# EAGLE board main (EAGLE 9.0.1)
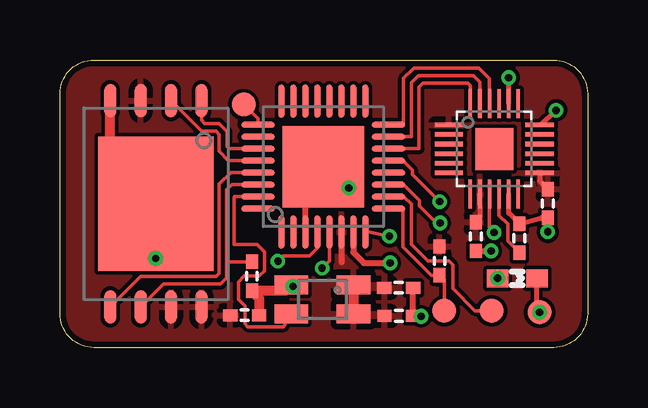
[diagram p0: board, top side]
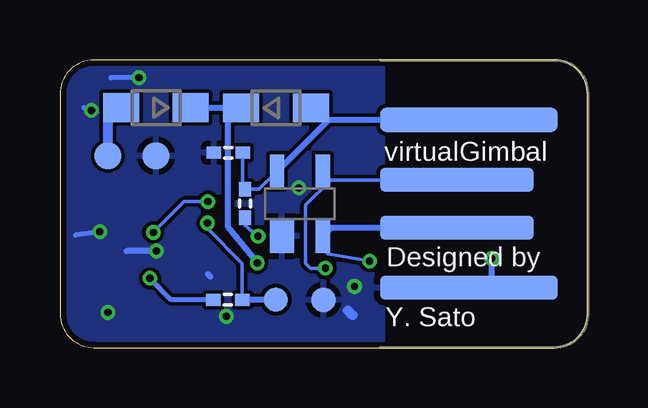
[diagram p1: board, bottom side, seen from below]

Size 22 x 12 mm. Coordinates in mm from the lower left corner, seen from the top.
Outline: 1.41,0 arc-90 0,1.41 0,10.59 arc-90 1.41,12 20.59,12 arc-90 22,10.59 22,1.41 arc-90 20.59,0 1.41,0
Copper layers (1*16): Top 0.035mm / dielectric 1.5mm / Bottom 0.035mm
Design rules "SeeedStudio_2layer_DRU_no_angle_20140221": minimum track width 6mil, minimum drill 12mil, track to track 6mil, track to pad 6mil, pad to pad 6mil, via to via 6mil, smd to smd 0mil, copper to edge 10mil, drill to drill 10mil, minimum pad ring 10mil, minimum via ring 6mil, stop-mask expansion 2mil, vias tented up to drill 100mil, thermal gap 10mil

## Footprints (pad centres in the part's own frame; a part is rotated, then mirrored left to right if it is on the bottom)
1005 = smd 0.6 x 0.5: P$1 -0.6,0; P$2 0.6,0
TP10R = smd 1 x 1: TP 0,0
USB_BARE = smd 1 x 7.41: 1 3.5,-3.705; 4 -3.5,-3.705 | smd 1 x 6.41: 2 1,-3.205; 3 -1,-3.205
SOD323-W = smd 1.5 x 1.2: A 1.45,0; C -1.45,0
SOT143 = smd 1 x 1.4: 1 -0.75,-1.35 | smd 0.6 x 1.4: 2 0.95,-1.35; 3 0.95,1.35; 4 -0.95,1.35
TP11R = smd 1.1 x 1.1: TP 0,0
QFN32 = smd 1.4 x 0.25: 1 -2.725,1.75; 2 -2.725,1.25; 3 -2.725,0.75; 4 -2.725,0.25; 5 -2.725,-0.25; 6 -2.725,-0.75; 7 -2.725,-1.25; 8 -2.725,-1.75; 17 2.725,-1.75; 18 2.725,-1.25; 19 2.725,-0.75; 20 2.725,-0.25; 21 2.725,0.25; 22 2.725,0.75; 23 2.725,1.25; 24 2.725,1.75 | smd 0.25 x 1.4: 9 -1.75,-2.725; 10 -1.25,-2.725; 11 -0.75,-2.725; 12 -0.25,-2.725; 13 0.25,-2.725; 14 0.75,-2.725; 15 1.25,-2.725; 16 1.75,-2.725; 25 1.75,2.725; 26 1.25,2.725; 27 0.75,2.725; 28 0.25,2.725; 29 -0.25,2.725; 30 -0.75,2.725; 31 -1.25,2.725; 32 -1.75,2.725 | smd 3.4 x 3.4: B 0,0
V-PDFN-8 = smd 1.4 x 0.5: 1 -4.3,1.905; 2 -4.3,0.635; 3 -4.3,-0.635; 4 -4.3,-1.905; 5 4.3,-1.905; 6 4.3,-0.635; 7 4.3,0.635; 8 4.3,1.905 | smd 5.6 x 4.8: B 0,0
KC2016K = smd 1.4 x 0.8: 1 -1.3,-0.6; 2 1.3,-0.6; 3 1.3,0.6; 4 -1.3,0.6
QFN-24 = smd 1.22 x 0.2: 1 -1.89,1; 2 -1.89,0.6; 3 -1.89,0.2; 4 -1.89,-0.2; 5 -1.89,-0.6; 6 -1.89,-1; 13 1.89,-1; 14 1.89,-0.6; 15 1.89,-0.2; 16 1.89,0.2; 17 1.89,0.6; 18 1.89,1 | smd 0.2 x 1.22: 7 -1,-1.89; 8 -0.6,-1.89; 9 -0.2,-1.89; 10 0.2,-1.89; 11 0.6,-1.89; 12 1,-1.89; 19 1,1.89; 20 0.6,1.89; 21 0.2,1.89; 22 -0.2,1.89; 23 -0.6,1.89; 24 -1,1.89 | smd 1.59 x 1.75: B 0,0
1608-OLI = smd 0.89 x 0.76: A -0.825,0; K 0.825,0

## Placement (x,y rotation side)
C2  10n  [1005]  17.34,4.63 90 top
C2CK  PTR1TP10R  [TP10R]  16.03,1.54 0 top
C2D  PTR1TP10R  [TP10R]  18,1.54 0 top
C3  0.1u  [1005]  19.16,4.56 270 top
C4  0.1u  [1005]  20.34,6.01 90 top
C6  1.0u  [1005]  14.13,2.5 180 top
C9  0.1u  [1005]  7.7,1.35 180 top
C10  0.1u  [1005]  14.13,1.32 180 top
CN2  USB_BARE  [USB_BARE]  8.65,6 90 bottom
D1  [SOD323-W]  12.99,10 0 bottom
D2  [SOD323-W]  18,10.01 180 bottom
D3  SP0503BAH  [SOT143]  12,6 0 bottom
DGND  PTR1TP10R  [TP10R]  20,1.47 0 top
GND  PTR1TP10R  [TP10R]  11.01,1.99 0 bottom
HDMI_5V  PTR1TP11R  [TP11R]  20,8 0 bottom
HDMI_GND  PTR1TP11R  [TP11R]  18,8 0 bottom
IC1  C8051F381-GM  [QFN32]  10.98,7.55 90 top
IC3  N25Q512A  [V-PDFN-8]  4,6 270 top
IC4  KC2016K  [KC2016K]  10.94,2.01 180 top
IC6  MPU-9250  [QFN-24]  18.11,8.29 0 top
LED1  [1608-OLI]  19.07,2.89 0 top
P0.0  PTR1TP10R  [TP10R]  13,2 0 bottom
R1  100k  [1005]  14.98,8.13 0 bottom
R2  1k  [1005]  15.83,3.62 90 top
R3  100  [1005]  14.28,6.01 270 bottom
R7  10k  [1005]  15,2 0 bottom
R26  1k  [1005]  8,2.98 90 top
SW2  PTR1TP10R  [TP10R]  7.66,10.14 0 top

## Library data of the parts
C2-C4 C6 C9 C10 R1-R3 R7 R26 = reg,cap
C2CK C2D DGND GND HDMI_5V HDMI_GND P0.0 SW2 = testpad
CN2 = Connector
D1-D3 = diode
IC1 = C8051F34x
IC3 = EEPROM
IC4 = Oscillator
IC6 = GYRO
LED1 = LED

## Nets
+3V3: C2.P$2 C4.P$2 C6.P$2 C9.P$2 C10.P$2 IC1.6 IC3.3 IC3.7 IC3.8 IC4.1 IC4.4 IC6.1 IC6.8 IC6.13 R2.P$2
C2CK: C2CK.TP IC1.9 R2.P$1
C2D: C2D.TP IC1.10
D+: CN2.3 D3.2 IC1.4
D-: CN2.2 D3.3 IC1.5
DGND: C2.P$1 C3.P$1 C4.P$1 C6.P$1 C9.P$1 C10.P$1 CN2.4 D3.1 DGND.TP GND.TP HDMI_GND.TP IC1.3 IC1.B IC3.4 IC3.B IC4.2 IC6.11 IC6.18 IC6.20 LED1.K R1.P$1 R26.P$1
EEPROM_!CS: IC1.27 IC3.1
EEPROM_MISO: IC1.28 IC3.2
EEPROM_MOSI: IC1.29 IC3.5
EEPROM_SCK: IC1.30 IC3.6 R26.P$2
IMU_!CS: IC1.16 IC6.22
IMU_MISO: IC1.13 IC6.9
IMU_MOSI: IC1.14 IC6.24
IMU_SCK: IC1.15 IC6.23
IN: D1.C D2.C IC1.7
N$1: IC1.25 SW2.TP
N$7: D2.A HDMI_5V.TP
N$9: LED1.A R7.P$1
N$11: IC1.31 IC4.3
N$13: C3.P$2 IC6.10
N$15: IC1.11 P0.0.TP R7.P$2
N$18: IC1.8 R3.P$2
VBUS: CN2.1 D1.A D3.4 R1.P$2 R3.P$1

## Tracks (layer width: path | path; a pad name or v marks a point on that pad's centre or on a via)
+3V3
  Top 0.2: IC6.13 20,6.95 C4.P$2 | C2.P$2 17.53,5.45 IC6.8
  Top 0.254: IC1.6 11.74,3.57
  Top 0.406: IC3.8 | IC4.1 IC4.4
  pour Top: 0,12 22,12 22,0 0,0
C2CK
  Top 0.152: IC1.9 14.31,5.8 14.31,4.2 15.49,3.02 R2.P$1 | R2.P$1 15.73,2.78 | C2CK.TP 16.03,2.82 R2.P$1
C2D
  Top 0.152: IC1.10 14.33,6.3 14.65,5.98 14.65,4.31 15.35,3.61 16.22,3.61 16.38,3.45 16.38,2.47 17.31,1.54 C2D.TP
D+  (via drill 0.3)
  Top 0.152: IC1.4 10.73,4.16 10.4,3.83 9.31,3.83 v9.09,3.61
  Bottom 0.152: D3.2 11.05,4.14 10.82,3.91 v9.09,3.61
  Bottom 0.254: D3.2 10.7,5 CN2.3
D-  (via drill 0.3)
  Top 0.152: IC1.5 11.23,3.61 v10.93,3.31
  Bottom 0.152: D3.3 11.05,7.05 11,7 10.7,7 | 10.7,7 CN2.2 | 10.7,7 11.76,5.94 11.76,3.52 11.55,3.31 v10.93,3.31
DGND  (via drill 0.3)
  Top 0.152: 11.06,6.46 11.05,6.46 IC1.B 11.02,7.27 v12.04,6.66 | v3.99,3.72 IC3.B | IC4.2 v9.72,2.55
  Top 0.2: IC6.20 v18.71,11.26 | IC6.18 v20.69,9.9 | v20.34,4.83 C4.P$1 20.06,5.41 C3.P$1 18.71,5.61 IC6.11 | v15.06,1.3 14.74,1.3 C10.P$1 | LED1.K 19.89,1.57 DGND.TP
  Top 0.254: IC1.3 10.23,6.8 IC1.B | C10.P$1 C6.P$1 | C2.P$1 v17.98,4.03
  Top 0.406: IC3.4 2.09,6.8 2.4,6.5 | IC1.B 10.45,7.55 | v3.99,3.72 3.99,3.6 | IC4.2 9.41,2.38 R26.P$1 8.3,2.08 C9.P$1
  Top 0.61: 2.4,6.5 3,6.5 IC3.B 5.35,5.5 5.95,6.1 | IC1.B 10.24,6.81
  Bottom 0.2: v18.71,11.26 19.87,11.26 19.88,11.25 | v20.69,9.9 21,10.01 21.01,10.02 | v20.34,4.83 21.34,4.7 21.35,4.69
  Bottom 0.254: v17.98,4.03 19.22,4.03 | 15.83,3.06 15.73,2.96 | v3.99,3.72 3.99,2.5 CN2.4
  Bottom 0.406: 10,1.55 9.8,1.35
  other vias: 20,1.47
  pour Bottom (rank 2): 8.56,11.99 25,12 25,0 8.56,-0.01
EEPROM_!CS
  Top 0.152: IC3.1 5.9,9.48 6.04,9.35 6.63,9.35 6.96,9.02 6.96,8.38 7.03,8.31 IC1.27
EEPROM_MISO
  Top 0.152: IC3.2 5.9,9.03 6.5,9.03 6.64,8.89 6.64,8.19 7.02,7.81 IC1.28
EEPROM_MOSI
  Top 0.152: IC3.5 3.36,2.96 6.51,2.96 6.64,3.09 6.64,6.82 7.13,7.31 IC1.29
EEPROM_SCK
  Top 0.152: IC3.6 4.32,2.65 6.7,2.65 6.95,2.9 6.95,3.58 | IC1.30 7.17,6.81 6.95,6.59 6.95,3.58 | 6.95,3.58 R26.P$2
IMU_!CS
  Top 0.152: IC1.16 14.33,9.3 14.33,11.23 14.76,11.66 17.46,11.66 17.91,11.21 IC6.22
IMU_MISO  (via drill 0.3)
  Top 0.152: IC6.9 17.91,5 v18.11,4.8 | IC1.13 14.3,7.8 14.7,7.4 14.7,7.22 v15.83,6.09
  Bottom 0.152: v15.83,6.09 16.82,6.09 v18.11,4.8
IMU_MOSI
  Top 0.152: IC1.14 14.97,8.3 14.97,10.86 15.14,11.03 17,11.03 17.11,10.92 IC6.24
IMU_SCK
  Top 0.152: IC1.15 14.66,8.8 14.66,11.06 14.94,11.34 17.24,11.34 17.51,11.07 IC6.23
IN  (via drill 0.3)
  Top 0.254: IC1.7 12.23,3.97 12.67,3.53 v13.77,3.53
  Bottom 0.254: D1.C D2.C | 14.98,9.46 14.98,5.04 v13.77,3.53
  Bottom 0.305: 14.98,9.46 D1.C
N$1
  Top 0.152: SW2.TP 8.26,9.55 IC1.25
N$7
  Bottom 0.406: HDMI_5V.TP 20,9.46 D2.A
N$9  (via drill 0.3)
  Bottom 0.2: R7.P$1 17.36,2 v18.24,2.89
N$11
  Top 0.152: IC1.31 7.29,6.3 7.26,6.27 7.26,4.31 8.22,4.31 8.53,4 8.53,3.2 8.31,2.98 7.68,2.98 7.45,2.75 7.45,2.02 7.72,1.75 7.72,0.98 7.83,0.87 9.33,0.87 IC4.3
N$13
  Top 0.152: IC6.10 18.31,5.51 18.67,5.15 18.67,4.45 C3.P$2
N$15  (via drill 0.3)
  Top 0.152: IC1.11 14.32,6.8 14.99,6.13 14.99,5.91 15.7,5.2 v15.85,5.2
  Bottom 0.152: R7.P$2 14.4,3.52 15.85,4.97 v15.85,5.2
  Bottom 0.254: P0.0.TP R7.P$2
N$18  (via drill 0.3)
  Top 0.152: IC1.8 12.88,4.82 v13.74,4.64
  Bottom 0.152: R3.P$2 14.29,5.1 v13.74,4.64
VBUS
  Bottom 0.152: D3.4 13.69,6.61 R3.P$1 14.38,6.71 R1.P$2
  Bottom 0.254: 10.8,9.5 D3.4 | CN2.1 10.8,9.5 | D1.A 11.3,10 10.8,9.5

## Text on the board
bNames: virtualGimbal | Designed by | Y. Sato